# EAGLE board FPGA board V2 PCB (EAGLE 7.6.0), part 1 of 2
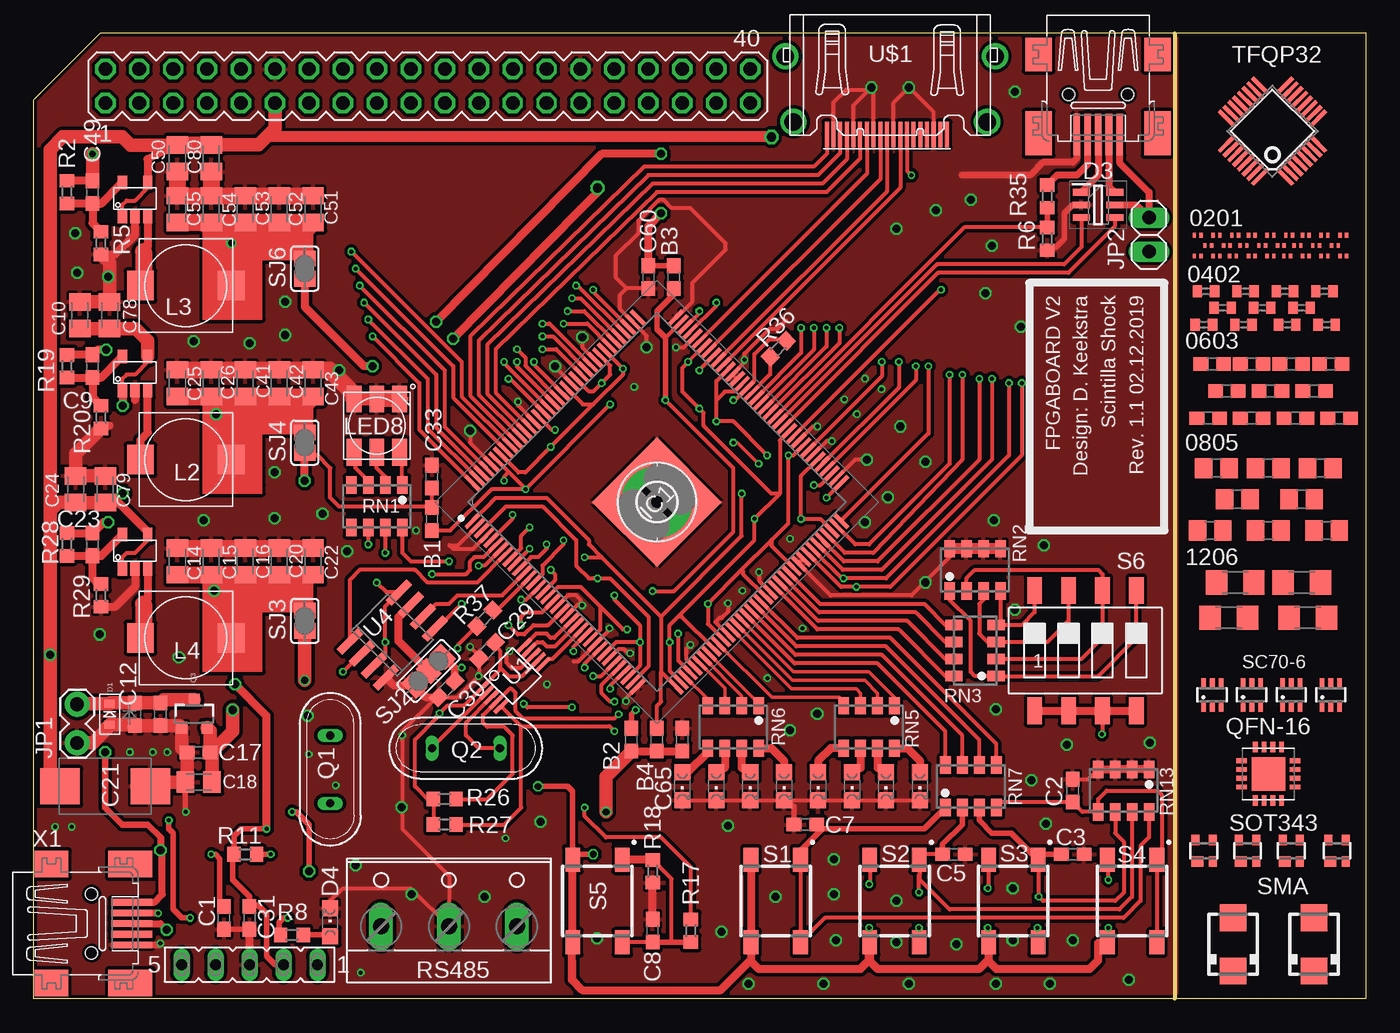
[diagram p0: board, top side]
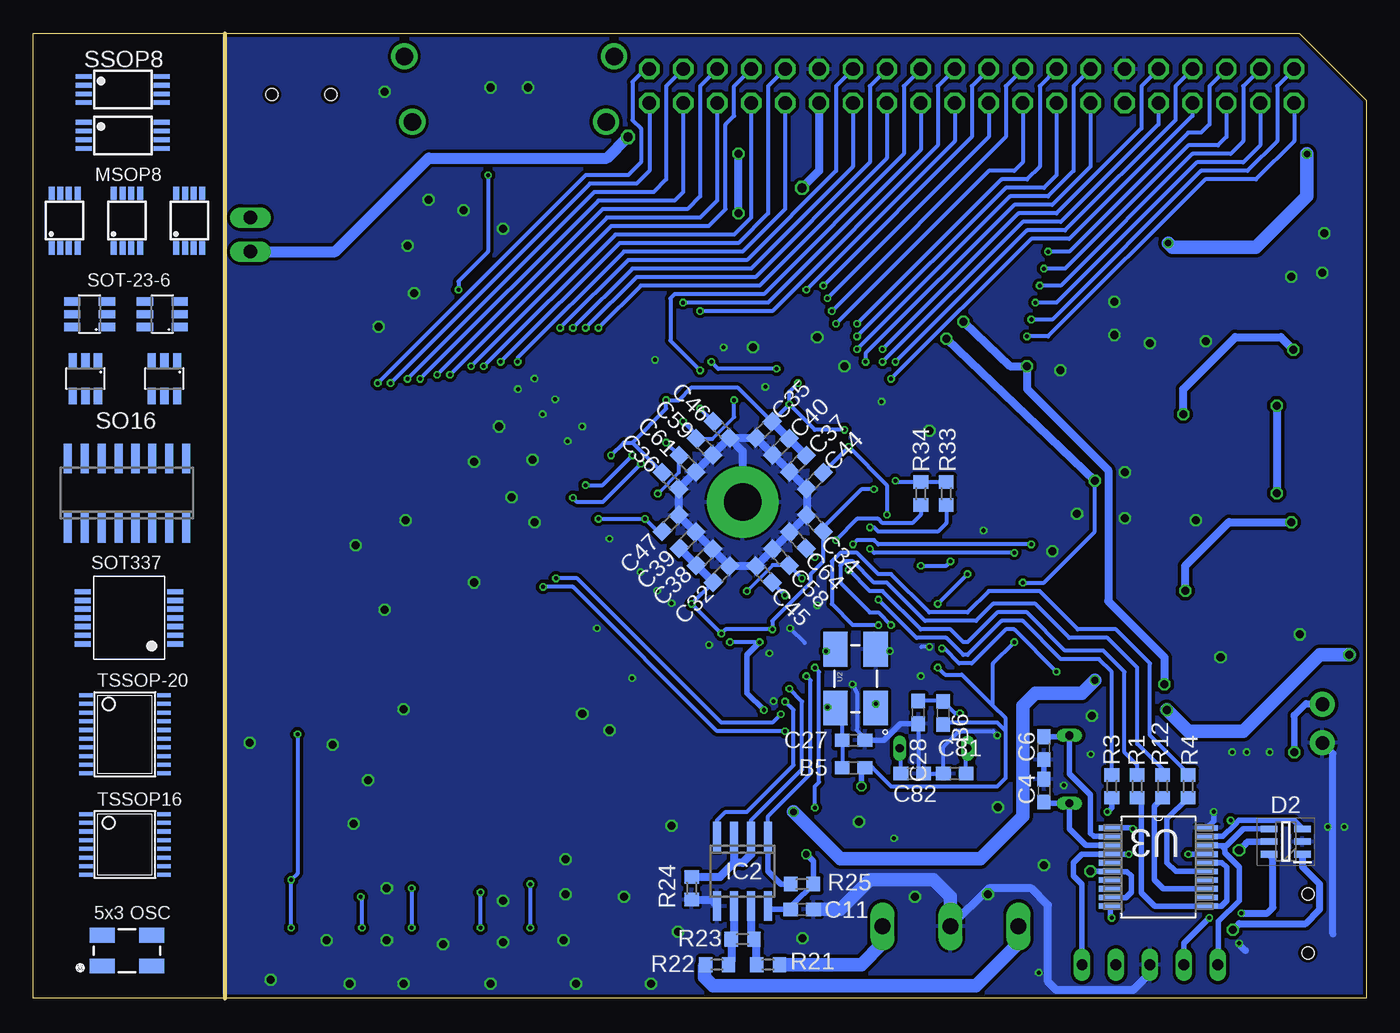
[diagram p1: board, bottom side, seen from below]

Size 99.72 x 72.19 mm. Coordinates in mm from the lower left corner, seen from the top.
Outline: 0,0 99.72,0 99.72,72.19 5,72.19 0,67.19 0,0
Copper layers (1*16): Top 0.018mm / dielectric 1.55mm / Bottom 0.018mm
Design rules "eC_2Layer_PClass6_BaseCopperO18_eCDefault *": minimum track width 0.15mm, minimum drill 0.3mm, track to track 0.15mm, track to pad 0.15mm, pad to pad 0.15mm, via to via 0.15mm, smd to smd 0mil, copper to edge 0.25mm, drill to drill 0.35mm, minimum pad ring 0.175mm, minimum via ring 0.125mm, stop-mask expansion 0mil, vias tented up to drill 0.35mm, thermal gap 0.2mm
Milling: 1 lines

## Footprints (pad centres in the part's own frame; a part is rotated, then mirrored left to right if it is on the bottom)
C0201 = smd 0.25 x 0.35: 1 -0.25,0; 2 0.25,0
C0402 = smd 0.7 x 0.9: 1 -0.65,0; 2 0.65,0
C0603 = smd 1.1 x 1: 1 -0.85,0; 2 0.85,0
C0805 = smd 1.3 x 1.5: 1 -0.95,0; 2 0.95,0
C1206 = smd 1.6 x 1.8: 1 -1.4,0; 2 1.4,0
C0805K = smd 1.3 x 1.6: 1 -1,0; 2 1,0
D/7343-31W = smd 2.95 x 2.7: + 3.375,0; - -3.375,0
SOD-523 = smd 0.8 x 0.6: A 0,-0.8; K 0,0.8
SOT95P275X110-6N = smd 1.25 x 0.5: 1 -1.25,0.95; 2 -1.25,0; 3 -1.25,-0.95; 4 1.25,-0.95; 5 1.25,0; 6 1.25,0.95
CHIPLED_0805 = smd 1.2 x 1.2: A 0,-1.05; C 0,1.05
TSOT23-6 = smd 0.62 x 1.22: 1 -0.95,-1.3; 2 0,-1.3; 3 0.95,-1.3; 4 0.95,1.3; 5 0,1.3; 6 -0.95,1.3
CRYSTAL-OSC-SMD-5X3 = smd 1.9 x 1.1: 1 -1.85,-1.15; 2 1.85,-1.15; 3 1.85,1.15; 4 -1.85,1.15
TSSOP8 = smd 1.2 x 0.35: 1 -2.925,0.975; 2 -2.925,0.325; 3 -2.925,-0.325; 4 -2.925,-0.975; 5 2.925,-0.975; 6 2.925,-0.325; 7 2.925,0.325; 8 2.925,0.975
MSOP8 = smd 0.45 x 1: 1 -0.975,-2.05; 2 -0.325,-2.05; 3 0.325,-2.05; 4 0.975,-2.05; 5 0.975,2.05; 6 0.325,2.05; 7 -0.325,2.05; 8 -0.975,2.05
SC70-6L = smd 0.35 x 0.8: 1 -0.65,-0.85; 2 0,-0.85; 3 0.65,-0.85; 4 0.65,0.85; 5 0,0.85; 6 -0.65,0.85
SOT343_INFINEON = smd 0.9 x 0.8: 1 -0.5,-0.8 | smd 0.6 x 0.8: 2 0.65,-0.8; 3 0.65,0.8; 4 -0.65,0.8
SMA = smd 2 x 2: A 2,0; C -2,0
2,8-PAD = drill 2.8 pad 5.334: B2,8 0,0
QFP50P2200X2200X165-145N = smd 1.475 x 0.3: 1 -10.738,8.75; 2 -10.738,8.25; 3 -10.738,7.75; 4 -10.738,7.25; 5 -10.738,6.75; 6 -10.738,6.25; 7 -10.738,5.75; 8 -10.738,5.25; 9 -10.738,4.75; 10 -10.738,4.25; 11 -10.738,3.75; 12 -10.738,3.25; 13 -10.738,2.75; 14 -10.738,2.25; 15 -10.738,1.75; 16 -10.738,1.25; 17 -10.738,0.75; 18 -10.738,0.25; 19 -10.738,-0.25; 20 -10.738,-0.75; 21 -10.738,-1.25; 22 -10.738,-1.75; 23 -10.738,-2.25; 24 -10.738,-2.75; 25 -10.738,-3.25; 26 -10.738,-3.75; 27 -10.738,-4.25; 28 -10.738,-4.75; 29 -10.738,-5.25; 30 -10.738,-5.75; 31 -10.738,-6.25; 32 -10.738,-6.75; 33 -10.738,-7.25; 34 -10.738,-7.75; 35 -10.738,-8.25; 36 -10.738,-8.75; 73 10.738,-8.75; 74 10.738,-8.25; 75 10.738,-7.75; 76 10.738,-7.25; 77 10.738,-6.75; 78 10.738,-6.25; 79 10.738,-5.75; 80 10.738,-5.25; 81 10.738,-4.75; 82 10.738,-4.25; 83 10.738,-3.75; 84 10.738,-3.25; 85 10.738,-2.75; 86 10.738,-2.25; 87 10.738,-1.75; 88 10.738,-1.25; 89 10.738,-0.75; 90 10.738,-0.25; 91 10.738,0.25; 92 10.738,0.75; 93 10.738,1.25; 94 10.738,1.75; 95 10.738,2.25; 96 10.738,2.75; 97 10.738,3.25; 98 10.738,3.75; 99 10.738,4.25; 100 10.738,4.75; 101 10.738,5.25; 102 10.738,5.75; 103 10.738,6.25; 104 10.738,6.75; 105 10.738,7.25; 106 10.738,7.75; 107 10.738,8.25; 108 10.738,8.75 | smd 0.3 x 1.475: 37 -8.75,-10.738; 38 -8.25,-10.738; 39 -7.75,-10.738; 40 -7.25,-10.738; 41 -6.75,-10.738; 42 -6.25,-10.738; 43 -5.75,-10.738; 44 -5.25,-10.738; 45 -4.75,-10.738; 46 -4.25,-10.738; 47 -3.75,-10.738; 48 -3.25,-10.738; 49 -2.75,-10.738; 50 -2.25,-10.738; 51 -1.75,-10.738; 52 -1.25,-10.738; 53 -0.75,-10.738; 54 -0.25,-10.738; 55 0.25,-10.738; 56 0.75,-10.738; 57 1.25,-10.738; 58 1.75,-10.738; 59 2.25,-10.738; 60 2.75,-10.738; 61 3.25,-10.738; 62 3.75,-10.738; 63 4.25,-10.738; 64 4.75,-10.738; 65 5.25,-10.738; 66 5.75,-10.738; 67 6.25,-10.738; 68 6.75,-10.738; 69 7.25,-10.738; 70 7.75,-10.738; 71 8.25,-10.738; 72 8.75,-10.738; 109 8.75,10.738; 110 8.25,10.738; 111 7.75,10.738; 112 7.25,10.738; 113 6.75,10.738; 114 6.25,10.738; 115 5.75,10.738; 116 5.25,10.738; 117 4.75,10.738; 118 4.25,10.738; 119 3.75,10.738; 120 3.25,10.738; 121 2.75,10.738; 122 2.25,10.738; 123 1.75,10.738; 124 1.25,10.738; 125 0.75,10.738; 126 0.25,10.738; 127 -0.25,10.738; 128 -0.75,10.738; 129 -1.25,10.738; 130 -1.75,10.738; 131 -2.25,10.738; 132 -2.75,10.738; 133 -3.25,10.738; 134 -3.75,10.738; 135 -4.25,10.738; 136 -4.75,10.738; 137 -5.25,10.738; 138 -5.75,10.738; 139 -6.25,10.738; 140 -6.75,10.738; 141 -7.25,10.738; 142 -7.75,10.738; 143 -8.25,10.738; 144 -8.75,10.738 | smd 6.85 x 6.85: 145 0,0
SO-08 = smd 0.6 x 2.2: 1 -1.905,-2.6; 2 -0.635,-2.6; 3 0.635,-2.6; 4 1.905,-2.6; 5 1.905,2.6; 6 0.635,2.6; 7 -0.635,2.6; 8 -1.905,2.6
1X02_LOCK = drill 1.016 pad 1.88: 1 -0.178,0; 2 2.718,0
1X02 = drill 1.016 long: 1 -1.27,0; 2 1.27,0
SLF7032T = smd 2 x 2.2: P$1 -3.4,0; P$2 3.4,0
RGBLED5050 = smd 2 x 1.1: 1 -2,1.7; 2 -2,0; 3 -2,-1.7; 4 2,-1.7; 5 2,0; 6 2,1.7
QS = drill 0.61 long: 1 -2.54,0; 2 2.54,0
SOT23-3 = smd 0.8 x 0.9: 1 -0.95,-1; 2 0.95,-1; 3 0,1.1
QFN16-4X4 = smd 0.8 x 0.35: 1 -2,0.975; 2 -2,0.325; 3 -2,-0.325; 4 -2,-0.975; 9 2,-0.975; 10 2,-0.325; 11 2,0.325; 12 2,0.975 | smd 0.35 x 0.8: 5 -0.975,-2; 6 -0.325,-2; 7 0.325,-2; 8 0.975,-2; 13 0.975,2; 14 0.325,2; 15 -0.325,2; 16 -0.975,2 | smd 2.5 x 2.5: EXP 0,0
R0603 = smd 1 x 1.1: 1 -0.85,0; 2 0.85,0
744-8NS = smd 0.8 x 1.3: 1 -1.905,-1.587; 2 -0.635,-1.587; 3 0.635,-1.587; 4 1.905,-1.587; 5 1.905,1.587; 6 0.635,1.587; 7 -0.635,1.587; 8 -1.905,1.587
W237-3E = drill 1.194 long: 1 -5.08,-0.635; 2 0,-0.635; 3 5.08,-0.635
SKQGAKE010 = smd 1.8 x 1.1: 1 -3.1,1.85; 2 3.1,1.85; 3 -3.1,-1.85; 4 3.1,-1.85
SMS-004 = smd 1.092 x 2.007: 1 -3.81,-4.496; 2 -1.27,-4.496; 3 1.27,-4.496; 4 3.81,-4.496; 5 3.81,4.496; 6 1.27,4.496; 7 -1.27,4.496; 8 -3.81,4.496
SJ_2 = smd 1.168 x 1.6: 1 -1.524,0; 2 0,0; 3 1.524,0
SJ = smd 1.168 x 1.6: 1 -0.762,0; 2 0.762,0
SO16 = smd 0.6 x 2.2: 1 -4.445,-2.6; 2 -3.175,-2.6; 3 -1.905,-2.6; 4 -0.635,-2.6; 5 0.635,-2.6; 6 1.905,-2.6; 7 3.175,-2.6; 8 4.445,-2.6; 9 4.445,2.6; 10 3.175,2.6; 11 1.905,2.6; 12 0.635,2.6; 13 -0.635,2.6; 14 -1.905,2.6; 15 -3.175,2.6; 16 -4.445,2.6
SOT337 = smd 0.4 x 1.2: 1 -1.95,-3.45; 2 -1.3,-3.45; 3 -0.65,-3.45; 4 0,-3.45; 5 0.65,-3.45; 6 1.3,-3.45; 7 1.95,-3.45; 8 1.95,3.45; 9 1.3,3.45; 10 0.65,3.45; 11 0,3.45; 12 -0.65,3.45; 13 -1.3,3.45; 14 -1.95,3.45
FE05-1 = drill 0.813 long: 1 -5.08,0; 2 -2.54,0; 3 0,0; 4 2.54,0; 5 5.08,0
MA20-2 = drill 1.016 octagon: 1 -24.13,-1.27; 2 -24.13,1.27; 3 -21.59,-1.27; 4 -21.59,1.27; 5 -19.05,-1.27; 6 -19.05,1.27; 7 -16.51,-1.27; 8 -16.51,1.27; 9 -13.97,-1.27; 10 -13.97,1.27; 11 -11.43,-1.27; 12 -11.43,1.27; 13 -8.89,-1.27; 14 -8.89,1.27; 15 -6.35,-1.27; 16 -6.35,1.27; 17 -3.81,-1.27; 18 -3.81,1.27; 19 -1.27,-1.27; 20 -1.27,1.27; 21 1.27,-1.27; 22 1.27,1.27; 23 3.81,-1.27; 24 3.81,1.27; 25 6.35,-1.27; 26 6.35,1.27; 27 8.89,-1.27; 28 8.89,1.27; 29 11.43,-1.27; 30 11.43,1.27; 31 13.97,-1.27; 32 13.97,1.27; 33 16.51,-1.27; 34 16.51,1.27; 35 19.05,-1.27; 36 19.05,1.27; 37 21.59,-1.27; 38 21.59,1.27; 39 24.13,-1.27; 40 24.13,1.27
LQFP-32 = smd 0.3 x 1.6: 1 -1.75,-3.1; 2 -1.25,-3.1; 3 -0.75,-3.1; 4 -0.25,-3.1; 5 0.25,-3.1; 6 0.75,-3.1; 7 1.25,-3.1; 8 1.75,-3.1; 17 1.75,3.1; 18 1.25,3.1; 19 0.75,3.1; 20 0.25,3.1; 21 -0.25,3.1; 22 -0.75,3.1; 23 -1.25,3.1; 24 -1.75,3.1 | smd 1.6 x 0.3: 9 3.1,-1.75; 10 3.1,-1.25; 11 3.1,-0.75; 12 3.1,-0.25; 13 3.1,0.25; 14 3.1,0.75; 15 3.1,1.25; 16 3.1,1.75; 25 -3.1,1.75; 26 -3.1,1.25; 27 -3.1,0.75; 28 -3.1,0.25; 29 -3.1,-0.25; 30 -3.1,-0.75; 31 -3.1,-1.25; 32 -3.1,-1.75
TSSOP16 = smd 0.305 x 0.991: 1 -2.275,-2.918; 2 -1.625,-2.918; 3 -0.975,-2.918; 4 -0.325,-2.918; 5 0.325,-2.918; 6 0.975,-2.918; 7 1.625,-2.918; 8 2.275,-2.918; 9 2.275,2.918; 10 1.625,2.918; 11 0.975,2.918; 12 0.325,2.918; 13 -0.325,2.918; 14 -0.975,2.918; 15 -1.625,2.918; 16 -2.275,2.918
TSSOP20 = smd 0.305 x 0.991: 1 -2.925,-2.918; 2 -2.275,-2.918; 3 -1.625,-2.918; 4 -0.975,-2.918; 5 -0.325,-2.918; 6 0.325,-2.918; 7 0.975,-2.918; 8 1.625,-2.918; 9 2.275,-2.918; 10 2.925,-2.918; 11 2.925,2.918; 12 2.275,2.918; 13 1.625,2.918; 14 0.975,2.918; 15 0.325,2.918; 16 -0.325,2.918; 17 -0.975,2.918; 18 -1.625,2.918; 19 -2.275,2.918; 20 -2.925,2.918
MSOP-10 = smd 1.4 x 0.3: 1 -2.2,1; 2 -2.2,0.5; 3 -2.2,0; 4 -2.2,-0.5; 5 -2.2,-1; 6 2.2,-1; 7 2.2,-0.5; 8 2.2,0; 9 2.2,0.5; 10 2.2,1
CRYSTAL-SMD-5X3_SOLDER = smd 2.6 x 1.8: 1 -2.2,-1.5; 2 2.2,-1.5; 3 2.2,1.5; 4 -2.2,1.5
SOP65P780X200-20N = smd 1.676 x 0.432: 1 -3.607,2.921; 2 -3.607,2.286; 3 -3.607,1.626; 4 -3.607,0.965; 5 -3.607,0.33; 6 -3.607,-0.33; 7 -3.607,-0.965; 8 -3.607,-1.626; 9 -3.607,-2.286; 10 -3.607,-2.921; 11 3.607,-2.921; 12 3.607,-2.286; 13 3.607,-1.626; 14 3.607,-0.965; 15 3.607,-0.33; 16 3.607,0.33; 17 3.607,0.965; 18 3.607,1.626; 19 3.607,2.286; 20 3.607,2.921
SOIC8 = smd 0.6 x 2.2: 1 -1.905,-2.6; 2 -0.635,-2.6; 3 0.635,-2.6; 4 1.905,-2.6; 5 1.905,2.6; 6 0.635,2.6; 7 -0.635,2.6; 8 -1.905,2.6
HDMI_A = smd 0.3 x 1.9: P$1 4.75,3.95; P$2 4.25,3.95; P$3 3.75,3.95; P$4 3.25,3.95; P$5 2.75,3.95; P$6 2.25,3.95; P$7 1.75,3.95; P$8 1.25,3.95; P$9 0.75,3.95; P$10 0.25,3.95; P$11 -0.25,3.95; P$12 -0.75,3.95; P$13 -1.25,3.95; P$14 -1.75,3.95; P$15 -2.25,3.95; P$16 -2.75,3.95; P$17 -3.25,3.95; P$18 -3.75,3.95; P$19 -4.25,3.95 | drill 1.3: P$20 -7.25,3; P$21 7.25,3; P$22 7.85,-1.9; P$23 -7.85,-1.9
TSOT-25 = smd 0.7 x 1: 1 -0.95,-1.2; 2 0,-1.2; 3 0.95,-1.2; 4 0.95,1.37; 5 -0.94,1.37
32005-201 = smd 3.1 x 0.5: 1 3,1.6; 2 3,0.8; 3 3,0; 4 3,-0.8; 5 3,-1.6 | smd 2.5 x 2: M1 -3,-4.45; M2 -3,4.45 | smd 3.3 x 2: M3 2.9,4.45; M4 2.9,-4.45 | hole 0.9: 0,2.2; 0,-2.2

## Placement (x,y rotation side)
0201  [C0201]  87.12,57.1 0 top
0402  [C0402]  87.74,52.9 0 top
0603  [C0603]  88.21,47.45 0 top
0805  [C0805]  88.52,39.67 0 top
1206  [C1206]  89.92,31.11 0 top
B1  B-EU  [C0603]  29.83,35.86 270 top
B2  B-EU  [C0603]  44.75,19.35 90 top
B3  B-EU  [C0603]  47.92,53.96 270 top
B4  B-EU  [C0603]  46.65,19.35 90 top
B5  B-EU  [C0603]  38.35,17.26 180 bottom
B6  B-EU  [C0603]  31.64,21.35 90 bottom
C1  100nF  [C0603]  14.27,6.02 90 top
C2  100nF  [C0603]  77.77,15.54 90 top
C3  100nF  [C0603]  77.77,10.78 0 top
C4  16pF  [C0603]  24.11,15.54 270 bottom
C5  100nF  [C0603]  68.88,10.78 180 top
C6  16pF  [C0603]  24.11,18.72 90 bottom
C7  100nF  [C0603]  57.77,13 0 top
C8  100nF  [C0603]  46.34,5.07 90 top
C9  22pF  [C0603]  4.43,47.29 270 top
C10  10uF X5R  [C0805K]  3.47,51.1 90 top
C11  100nF  [C0603]  42.21,6.65 0 bottom
C12  22pF  [C0603]  7.6,21.26 270 top
C13  100nF  [C0603]  9.51,21.26 270 top
C14  10uF X5R  [C0805K]  10.78,32.69 90 top
C15  10uF X5R  [C0805K]  13.32,32.69 90 top
C16  10uF X5R  [C0805K]  15.86,32.69 90 top
C17  100nF  [C0603]  12.36,18.4 180 top
C18  10uF X5R  [C0805K]  12.36,16.18 180 top
C20  10uF X5R  [C0805K]  18.4,32.69 90 top
C21  330uF 10V (10tpe330m)  [D/7343-31W]  5.38,15.86 180 top
C22  10uF X5R  [C0805K]  20.94,32.69 90 top
C23  22pF  [C0603]  4.43,33.96 270 top
C24  10uF X5R  [C0805K]  3.16,38.09 90 top
C25  10uF X5R  [C0805K]  10.78,46.02 90 top
C26  10uF X5R  [C0805K]  13.32,46.02 90 top
C27  100nF  [C0603]  38.35,19.32 180 bottom
C28  100nF  [C0603]  33.5,21.39 90 bottom
C29  100nF  [C0603]  33.95,26.02 225 top
C30  100nF  [C0603]  30.91,23.14 45 top
C31  100nF  [C0603]  16.17,6.02 270 top
C32  100nF  [C0603]  48.24,31.74 45 bottom
C33  100nF  [C0603]  29.83,39.04 90 top
C34  100nF  [C0603]  41.26,35.55 135 bottom
C35  100nF  [C0603]  45.07,42.53 225 bottom
C36  100nF  [C0603]  52.05,38.72 315 bottom
C37  100nF  [C0603]  42.53,39.99 225 bottom
C38  100nF  [C0603]  49.51,33.01 45 bottom
C39  100nF  [C0603]  50.78,34.28 45 bottom
C40  100nF  [C0603]  43.8,41.26 225 bottom
C41  10uF X5R  [C0805K]  15.86,46.02 90 top
C42  10uF X5R  [C0805K]  18.4,46.02 90 top
C43  10uF X5R  [C0805K]  20.94,46.02 90 top
C44  100nF  [C0603]  41.26,38.72 225 bottom
C45  100nF  [C0603]  45.07,31.74 135 bottom
C46  100nF  [C0603]  48.24,42.53 315 bottom
C47  100nF  [C0603]  52.05,35.55 45 bottom
C49  22pF  [C0603]  4.43,60.31 270 top
C50  10uF X5R  [C0805K]  10.78,62.85 270 top
C51  10uF X5R  [C0805K]  20.94,59.04 90 top
C52  10uF X5R  [C0805K]  18.4,59.04 90 top
C53  10uF X5R  [C0805K]  15.86,59.04 90 top
C54  10uF X5R  [C0805K]  13.32,59.04 90 top
C55  10uF X5R  [C0805K]  10.78,59.04 90 top
C58  100nF  [C0603]  43.8,33.01 135 bottom
C59  100nF  [C0603]  49.51,41.26 315 bottom
C60  100nF  [C0603]  46.02,53.96 270 top
C61  100nF  [C0603]  50.78,39.99 315 bottom
C64  100nF  [C0603]  42.53,34.28 135 bottom
C65  100nF  [C0603]  48.56,19.35 90 top
C78  10uF X5R  [C0805K]  5.7,51.1 90 top
C79  10uF X5R  [C0805K]  5.38,38.09 90 top
C80  10uF X5R  [C0805K]  13.32,62.85 270 top
C81  16pF  [C0603]  30.78,16.81 0 bottom
C82  16pF  [C0603]  33.95,16.81 180 bottom
D1  Bi TVS 5V  [SOD-523]  5.7,21.26 0 top
D2  IP4234CZ6,125  [SOT95P275X110-6N]  6.01,11.73 180 bottom
D3  IP4234CZ6,125  [SOT95P275X110-6N]  79.67,59.36 0 top
D4  LED0805  [CHIPLED_0805]  22.21,5.7 0 top
E$1  [TSOT23-6]  95.52,51.18 90 bottom
E$2  [TSOT23-6]  90.08,51.18 90 bottom
E$3  [CRYSTAL-OSC-SMD-5X3]  92.72,3.58 0 bottom
E$4  [TSOT23-6]  89.92,46.36 180 bottom
E$5  [C0201]  89.92,57.1 0 top
E$6  [C0201]  88.52,57.1 0 top
E$7  [C0201]  91.17,57.1 0 top
E$8  [C0201]  92.57,57.1 0 top
E$9  [C0201]  93.97,57.1 0 top
E$10  [C0201]  95.21,57.1 0 top
E$11  [C0201]  96.61,57.1 0 top
E$12  [C0201]  98.01,57.1 0 top
E$13  [C0201]  87.9,56.32 0 top
E$14  [C0201]  89.3,56.32 0 top
E$15  [C0201]  90.54,56.32 0 top
E$16  [C0201]  91.94,56.32 0 top
E$17  [C0201]  93.34,56.32 0 top
E$18  [C0201]  94.59,56.32 0 top
E$19  [C0201]  95.99,56.32 0 top
E$20  [C0201]  97.39,56.32 0 top
E$21  [C0402]  90.54,50.41 0 top
E$22  [C0402]  90.7,52.9 0 top
E$23  [C0402]  93.66,52.9 0 top
E$24  [C0402]  96.61,52.9 0 top
E$25  [C0402]  88.99,51.65 0 top
E$26  [C0402]  91.94,51.65 0 top
E$27  [C0402]  94.9,51.65 0 top
E$28  [C0402]  87.59,50.41 0 top
E$29  [C0402]  93.81,50.41 0 top
E$30  [C0402]  96.77,50.41 0 top
E$31  [C0805]  90.08,37.34 0 top
E$32  [C0603]  91.17,47.45 0 top
E$33  [TSSOP8]  93.03,64.56 0 bottom
E$34  [C0603]  94.12,47.45 0 top
E$35  [MSOP8]  92.72,58.19 0 bottom
E$36  [MSOP8]  88.06,58.19 0 bottom
E$37  [C0603]  97.08,47.45 0 top
E$38  [C0603]  89.3,45.43 0 top
E$39  [C0603]  92.57,45.43 0 top
E$40  [C0603]  95.83,45.43 0 top
E$41  [C0603]  87.9,43.41 0 top
E$42  [C0603]  91.17,43.41 0 top
E$43  [C0603]  94.43,43.41 0 top
E$44  [C0603]  97.7,43.41 0 top
E$45  [C0805]  92.41,39.67 0 top
E$46  [C0805]  96.3,39.67 0 top
E$47  [C0805]  94.9,37.34 0 top
E$48  [C0805]  88.06,35 0 top
E$49  [C0805]  92.41,35 0 top
E$50  [C0805]  96.77,35 0 top
E$51  [C0201]  87.12,55.54 0 top
E$52  [C0201]  88.52,55.54 0 top
E$53  [C0201]  89.77,55.54 0 top
E$54  [C0201]  91.17,55.54 0 top
E$55  [C0201]  92.57,55.54 0 top
E$56  [C0201]  93.81,55.54 0 top
E$57  [C0201]  95.21,55.54 0 top
E$58  [C0201]  96.61,55.54 0 top
E$59  [C0201]  98.01,55.54 0 top
E$60  [SC70-6L]  94.12,22.71 0 top
E$61  [C1206]  94.9,31.11 0 top
E$62  [C1206]  89.46,28.47 0 top
E$63  [C1206]  95.37,28.47 0 top
E$64  [SC70-6L]  91.17,22.71 0 top
E$65  [SC70-6L]  97.08,22.71 0 top
E$67  [SOT343_INFINEON]  90.86,11.05 0 top
E$68  [SOT343_INFINEON]  94.12,11.05 0 top
E$69  [SOT343_INFINEON]  97.55,11.05 0 top
E$70  [SMA]  95.83,4.04 90 top
H1  Ground pad for FPGA  [2,8-PAD]  46.65,37.13 0 top
IC1  10CL016YE144C8G  [QFP50P2200X2200X165-145N]  46.65,37.13 45 top
IC2  Any 3.3v rs485  [SO-08]  46.65,9.51 180 bottom
JP1  M02LOCK  [1X02_LOCK]  3.27,19.29 90 top
JP2  [1X02]  83.48,57.14 90 top
L2  3.3uH 1.9A PWR  [SLF7032T]  11.41,40.31 180 top
L3  3.3uH 1.9A PWR  [SLF7032T]  11.41,53.33 180 top
L4  3.3uH 1.9A PWR  [SLF7032T]  11.41,26.97 180 top
LED0  LED0805  [CHIPLED_0805]  48.56,15.86 180 top
LED1  LED0805  [CHIPLED_0805]  51.1,15.86 180 top
LED2  LED0805  [CHIPLED_0805]  53.64,15.86 180 top
LED3  LED0805  [CHIPLED_0805]  56.18,15.86 180 top
LED4  LED0805  [CHIPLED_0805]  58.72,15.86 180 top
LED5  LED0805  [CHIPLED_0805]  61.26,15.86 180 top
LED6  LED0805  [CHIPLED_0805]  63.8,15.86 180 top
LED7  LED0805  [CHIPLED_0805]  66.34,15.86 180 top
LED8  RGBLED5050  [RGBLED5050]  25.7,42.85 90 top
MSOP8  [MSOP8]  97.39,58.19 0 bottom
Q1  12MHz  [QS]  22.21,17.13 270 top
Q2  25MHz  [QS]  32.37,18.72 180 top
Q3  NTR2101P  [SOT23-3]  12.05,21.26 0 top
QFN-16  [QFN16-4X4]  92.41,16.8 0 top
R1  0  [R0603]  17.13,15.86 90 bottom
R2  32k  [R0603]  2.52,60.31 90 top
R3  0  [R0603]  19.03,15.86 90 bottom
R4  0  [R0603]  13.32,15.86 90 bottom
R5  10k  [R0603]  5.06,56.5 90 top
R6  200  [R0603]  75.86,56.82 90 top
R8  1k  [R0603]  19.35,4.75 180 top
R11  10k  [R0603]  15.86,10.78 180 top
R12  0  [R0603]  15.22,15.86 90 bottom
R17  1k  [R0603]  49.19,5.07 90 top
R18  10k  [R0603]  46.34,9.51 90 top
R19  150k  [R0603]  2.52,47.29 90 top
R20  33k  [R0603]  5.06,43.48 90 top
R21  10  [R0603]  44.75,2.53 0 bottom
R22  10  [R0603]  48.56,2.53 180 bottom
R23  120  [R0603]  46.65,4.43 0 bottom
R24  10k  [R0603]  50.46,8.24 90 bottom
R25  10k  [R0603]  42.21,8.56 180 bottom
R26  2k2  [R0603]  30.78,14.91 0 top
R27  2k2  [R0603]  30.78,13 0 top
R28  100k  [R0603]  2.52,33.96 90 top
R29  100k  [R0603]  5.06,30.15 90 top
R33  10k  [R0603]  31.41,37.77 270 bottom
R34  10k  [R0603]  33.32,37.77 270 bottom
R35  100  [R0603]  75.86,59.99 90 top
R36  10k  [R0603]  55.74,48.6 45 top
R37  25R  [R0603]  33.78,28.45 45 top
RN1  1k  [744-8NS]  25.7,36.82 180 top
RN2  10k  [744-8NS]  70.47,32.05 0 top
RN3  1k  [744-8NS]  70.47,26.02 90 top
RN5  1k  [744-8NS]  62.53,20.31 180 top
RN6  1k  [744-8NS]  52.37,20.31 180 top
RN7  1k  [744-8NS]  70.15,15.86 0 top
RN13  10k  [744-8NS]  81.58,15.54 180 top
RS485  [W237-3E]  31.1,6.02 0 top
S1  SKQGADE010  [SKQGAKE010]  55.54,7.29 270 top
S2  SKQGADE010  [SKQGAKE010]  64.43,7.29 270 top
S3  SKQGADE010  [SKQGAKE010]  73.32,7.29 270 top
S4  SKQGADE010  [SKQGAKE010]  82.21,7.29 270 top
S5  SKQGADE010  [SKQGAKE010]  42.21,7.29 270 top
S6  SWS004  [SMS-004]  78.72,26.02 0 top
SC70-6  [SC70-6L]  88.21,22.71 0 top
SJ2  [SJ_2]  29.56,24.49 225 top
SJ3  [SJ]  20.3,28.24 270 top
SJ4  [SJ]  20.3,41.58 270 top
SJ6  [SJ]  20.3,54.6 270 top
SMA  [SMA]  89.77,4.04 90 top
SO16  [SO16]  92.72,37.8 0 bottom
SOT337  [SOT337]  92.57,28.47 90 bottom
SOT343  [SOT343_INFINEON]  87.59,11.05 0 top
SOT-23-6  [TSOT23-6]  95.83,46.36 180 bottom
SSOP8  [TSSOP8]  93.03,67.99 0 bottom
SV1  [FE05-1]  16.17,2.53 180 top
SV4  [MA20-2]  29.51,68.25 0 top
TFQP32  [LQFP-32]  92.72,64.87 45 top
TSSOP16  [TSSOP16]  92.88,11.51 270 bottom
TSSOP-20  [TSSOP20]  92.88,19.76 270 bottom
U1  [MSOP-10]  35.86,24.12 45 top
U2  OSCILLATOR5X3_SOLDER  [CRYSTAL-SMD-5X3_SOLDER]  38.19,23.92 90 bottom
U3  PIC18F14K50-I/SS  [SOP65P780X200-20N]  15.54,9.83 0 bottom
U4  IS25LQ040B-JNLE  [SOIC8]  26.87,27.18 315 top
U$1  HDMI  [HDMI_A]  64.12,68.57 180 top
U$3  AP3429  [TSOT-25]  7.6,46.66 0 top
U$7  AP3429  [TSOT-25]  7.6,33.32 0 top
U$11  AP3429  [TSOT-25]  7.6,59.68 0 top
X1  MINI-USB-32005-201  [32005-201]  4.36,5.6 0 top
X2  MINI-USB-32005-201  [32005-201]  79.67,67.61 270 top

## Library data of the parts
0201 0603 0805 1206 E$5-E$20 E$31-E$65 E$67-E$69 L2-L4 MSOP8 SC70-6 SO16 SOT343 SSOP8 TFQP32 TSSOP16 TSSOP-20 U4 U$3 U$7 U$11 = 00dkeekstra
0402 C1-C18 C20-C47 C49-C55 C58-C61 C64 C65 C78-C82 E$21-E$30 R1-R5 R8 R11 R12 R17-R20 R28 R29 R33 R34 R36 = rcl
B1-B6 = rcl; B: 1.2A
D1 LED8 = adafruit
D2 D3 = SamacSys_Parts; DESCRIPTION: TVS DIODE 5.5VWM 6TSOP; HEIGHT: 1.1mm; MANUFACTURER_NAME: Nexperia; MANUFACTURER_PART_NUMBER: IP4234CZ6,125; MOUSER_PART_NUMBER: 771-IP4234CZ6125; MOUSER_PRICE-STOCK: https://www.mouser.com/Search/Refine.aspx?Keyword=771-IP4234CZ6125
D4 LED0 LED1-LED7 = CEDT
E$1 E$2 E$4 SOT-23-6 = linear-technology
E$3 U2 = SparkFun-FreqCtrl_good
E$70 SMA = diode
H1 = holes
IC1 = SamacSys_Parts; DESCRIPTION: FPGA - Field Programmable Gate Array; HEIGHT: 1.65mm; MANUFACTURER_NAME: Intel; MANUFACTURER_PART_NUMBER: 10CL016YE144C8G; MOUSER_PART_NUMBER: 989-10CL016YE144C8G; MOUSER_PRICE-STOCK: https://www.mouser.com/Search/Refine.aspx?Keyword=989-10CL016YE144C8G
IC2 = texas; MF: TEXAS INSTRUMENTS; MPN: SN65176BD; OC_FARNELL: 9589970; OC_NEWARK: 08F5891
JP1 = SparkFun-Connectors
JP2 = pinhead
Q1 Q2 = special
Q3 = SparkFun-DiscreteSemi; PROD_ID: TRANS-11153
QFN-16 = 00_cody
R6 R21-R27 R35 R37 = resistor
RN1-RN3 RN5-RN7 RN13 = resistor-array
RS485 = con-wago-508; OC_FARNELL: unknown; OC_NEWARK: unknown
S1-S5 = SamacSys_Parts; DESCRIPTION: Tact switch,SMT,SPST,with stem,2.55N o/f Stem Tactile Switch, SPST-NO 50 mA 1.5mm; HEIGHT: mm; MANUFACTURER_NAME: ALPS; MANUFACTURER_PART_NUMBER: SKQGADE010; MOUSER_PART_NUMBER: 688-SKQGAD; MOUSER_PRICE-STOCK: https://www.mouser.com/Search/Refine.aspx?Keyword=688-SKQGAD
S6 = smd-special
SJ2-SJ4 SJ6 = jumper
SOT337 = nxp_60
SV1 = con-lsta; OC_FARNELL: unknown; OC_NEWARK: unknown
SV4 = con-lstb; OC_FARNELL: unknown; OC_NEWARK: unknown
U1 = Tristan+Robitaille's+Library
U3 = PIC18F14K50-I_SS; AVAILABILITY: Unavailable; DESCRIPTION: PIC18 Series 768 B RAM 16 kB Flash 8-Bit Enhanced Microcontroller - SSOP-20; MF: Microchip; MP: PIC18F14K50-I/SS; PACKAGE: SSOP-20 Microchip; PRICE: None
U$1 = open-ephys
X1 X2 = con-cypressindustries; OC_FARNELL: unknown; OC_NEWARK: unknown

## Nets
50MHZ_OUT: IC1.25 U2.3
+1V2: B2.1 B4.1 C65.1 SJ3.2
+2V5: B3.1 C31.1 C60.1 R11.2 SJ6.2 SV1.2 U3.1
+3V3: B1.1 B5.1 B6.1 C11.1 C30.2 C33.1 IC2.8 R25.1 S1.3 S1.4 S2.3 S2.4 S3.3 S3.4 S4.3 S4.4 S5.3 S5.4 S6.1 S6.2 S6.3 S6.4 SJ2.1 SJ4.2 SV4.29 U4.3 U4.8
+5V: C10.1 C17.1 C18.1 C21.+ C24.1 C50.1 C78.1 C79.1 C80.1 JP2.1 Q3.2 SV4.11 U$3.1 U$3.4 U$7.1 U$7.4 U$11.1 U$11.4
CLK_SCL: IC1.66 R26.2 SV4.39 U1.4
CLK_SDA: IC1.65 R27.2 SV4.40 U1.5
D+: D2.3 SV1.4 U3.19
D-: D2.4 SV1.5 U3.18
FL_CE: IC1.8 U4.1
FL_CLK: IC1.12 U4.6
FL_SI: IC1.6 U4.5
FL_SO: IC1.13 R37.2
GND: C1.1 C2.2 C3.2 C4.1 C5.1 C6.1 C7.1 C8.2 C10.2 C11.2 C12.2 C13.2 C14.2 C15.2 C16.2 C17.2 C18.2 C20.2 C21.- C22.2 C24.2 C25.2 C26.2 C27.1 C28.1 C29.2 C30.1 C31.2 C32.2 C33.2 C34.2 C35.2 C36.2 C37.2 C38.2 C39.2 C40.2 C41.2 C42.2 C43.2 C44.2 C45.2 C46.2 C47.2 C50.2 C51.2 C52.2 C53.2 C54.2 C55.2 C58.2 C59.2 C60.2 C61.2 C64.2 C65.2 C78.2 C79.2 C80.2 C81.1 C82.1 D1.A D2.2 D3.2 D4.C H1.B2,8 IC1.2 IC1.4 IC1.19 IC1.21 IC1.27 IC1.30 IC1.36 IC1.41 IC1.48 IC1.57 IC1.63 IC1.64 IC1.74 IC1.79 IC1.82 IC1.95 IC1.96 IC1.104 IC1.108 IC1.110 IC1.118 IC1.123 IC1.131 IC1.140 IC1.145 IC2.5 JP1.1 LED0.C LED1.C LED2.C LED3.C LED4.C LED5.C LED6.C LED7.C LED8.4 LED8.5 LED8.6 Q3.1 R5.1 R6.1 R18.1 R20.1 R24.1 R29.1 RN2.5 RN2.6 RN2.7 RN2.8 RN13.1 RN13.2 RN13.3 RN13.4 RS485.2 SJ2.3 SV1.3 SV4.12 SV4.30 U1.8 U2.2 U3.20 U4.4 U$1.P$2 U$1.P$5 U$1.P$8 U$1.P$11 U$1.P$17 U$3.2 U$7.2 U$11.2 X1.5 X2.5
GPI_7: IC1.129 SV4.7
GPI_8: IC1.128 SV4.8
GPI_9: IC1.127 SV4.9
GPI_10: IC1.126 SV4.10
GPI_23: IC1.91 SV4.25
GPI_24: IC1.90 SV4.26
GPI_25: IC1.89 SV4.27
GPI_26: IC1.88 SV4.28
GPIO_1: IC1.144 SV4.1
GPIO_2: IC1.143 SV4.2
GPIO_3: IC1.142 SV4.3
GPIO_4: IC1.141 SV4.4
GPIO_5: IC1.137 SV4.5
GPIO_6: IC1.136 SV4.6
GPIO_11: IC1.125 SV4.13
GPIO_12: IC1.121 SV4.14
GPIO_13: IC1.120 SV4.15
GPIO_14: IC1.119 SV4.16
GPIO_15: IC1.115 SV4.17
GPIO_16: IC1.114 SV4.18
GPIO_17: IC1.113 SV4.19
GPIO_18: IC1.112 SV4.20
GPIO_19: IC1.111 SV4.21
GPIO_20: IC1.106 SV4.22
GPIO_21: IC1.105 SV4.23
GPIO_22: IC1.100 SV4.24
GPIO_27: IC1.80 SV4.31
GPIO_28: IC1.77 SV4.32
GPIO_29: IC1.76 SV4.33
GPIO_30: IC1.72 SV4.34
GPIO_31: IC1.71 SV4.35
GPIO_32: IC1.69 SV4.36
GPIO_33: IC1.68 SV4.37
GPIO_34: IC1.67 SV4.38
HDMI_CEC: IC1.83 U$1.P$13
HDMI_CLKN: IC1.98 U$1.P$12
HDMI_CLKP: IC1.99 U$1.P$10
HDMI_DATA0N: IC1.101 U$1.P$9
HDMI_DATA0P: IC1.103 U$1.P$7
HDMI_DATA1N: IC1.132 U$1.P$6
HDMI_DATA1P: IC1.133 U$1.P$4
HDMI_DATA2N: IC1.134 U$1.P$3
HDMI_DATA2P: IC1.135 U$1.P$1
L2: C9.1 C25.1 C26.1 C41.1 C42.1 C43.1 L2.P$1 R19.2 SJ4.1
LED_0: IC1.39 RN6.4
LED_1: IC1.42 RN6.3
LED_2: IC1.43 RN6.2
LED_3: IC1.44 RN6.1
LED_4: IC1.46 RN5.4
LED_5: IC1.49 RN5.3
LED_6: IC1.50 RN5.2
LED_7: IC1.51 RN5.1
N$1: R8.2 U3.10
N$2: D4.A R8.1
N$3: R1.1 U3.11 U3.16
N$4: L3.P$2 U$11.3
N$5: C1.2 U3.17
N$6: R4.1 U3.15
N$7: R11.1 SV1.1 U3.4
N$8: C49.1 C51.1 C52.1 C53.1 C54.1 C55.1 L3.P$1 R2.2 SJ6.1
N$9: C49.2 R2.1 R5.2 U$11.5
N$10: R3.1 U3.6 U3.9
N$11: D2.1 X1.3
N$12: R12.1 U3.13
N$13: D2.6 X1.2
N$15: RN2.3 RN3.3 S6.7
N$16: C4.2 Q1.2 U3.3
N$17: C6.2 Q1.1 U3.2
N$22: RN2.1 RN3.1 S6.5
N$23: RN2.2 RN3.2 S6.6
N$24: IC1.9 R33.2
N$25: RN2.4 RN3.4 S6.8
N$29: C14.1 C15.1 C16.1 C20.1 C22.1 C23.1 L4.P$1 R28.2 SJ3.1
N$30: C23.2 R28.1 R29.2 U$7.5
N$31: IC1.14 R34.2
N$33: IC1.92 R36.1
N$45: LED7.A RN5.8
N$46: LED6.A RN5.7
N$47: LED5.A RN5.6
N$48: LED4.A RN5.5
N$49: LED3.A RN6.8
N$50: D3.6 X2.2
N$51: LED2.A RN6.7
N$52: LED1.A RN6.6
N$53: LED0.A RN6.5
N$54: D3.1 X2.3
N$57: LED8.1 RN1.3
N$58: LED8.2 RN1.2
N$59: LED8.3 RN1.1
N$63: C2.1 RN7.4 RN13.5 S4.1 S4.2
N$64: C3.1 RN7.3 RN13.6 S3.1 S3.2
N$65: C5.2 RN7.2 RN13.7 S2.1 S2.2
N$67: C7.2 RN7.1 RN13.8 S1.1 S1.2
N$68: C8.1 R17.1 R18.2 S5.1 S5.2
N$75: C82.2 Q2.1 U1.3
N$76: C81.2 Q2.2 U1.2
N$77: D3.5 JP2.2 X2.1
N$78: L2.P$2 U$3.3
N$80: IC2.7 R21.1 R23.2
N$81: IC2.6 R22.1 R23.1
N$82: C9.2 R19.1 R20.2 U$3.5
N$83: R22.2 RS485.1
N$84: R21.2 RS485.3
N$86: SJ2.2 U4.7
N$87: IC1.109
N$88: L4.P$2 U$7.3
N$91: B6.2 C28.2 C29.1 R26.1 R27.1 U1.1 U1.7
N$93: B5.2 C27.2 U2.1 U2.4
N$113: R35.2 X2.4
PLL_CLK0: IC1.22 U1.10
PLL_CLK1: IC1.23 U1.9
PLL_CLK2: IC1.24 U1.6
RESET: IC1.28 R17.2
RGB_B: IC1.7 RN1.8
RGB_G: IC1.11 RN1.6
RGB_R: IC1.10 RN1.7
RS485_DIR: IC1.33 IC2.2 IC2.3 R24.2
RS485_RX: IC1.31 IC2.1 R25.2
RS485_TX: IC1.32 IC2.4
SO: R37.1 U4.2
SW_0: IC1.61 RN3.5
SW_1: IC1.60 RN3.6
SW_2: IC1.59 RN3.7
SW_3: IC1.58 RN3.8
SWS_0: IC1.55 RN7.5
SWS_1: IC1.54 RN7.6
SWS_2: IC1.53 RN7.7
SWS_3: IC1.52 RN7.8
TCK: IC1.16 R1.2
TDI: IC1.15 R3.2
TDO: IC1.20 R12.2
TMS: IC1.18 R4.2
USB_D+: D3.3 IC1.86
USB_D-: D3.4 IC1.85
USB_ID: IC1.87 R6.2 R35.1
VCCA: B3.2 C58.1 C59.1 IC1.3 IC1.35 IC1.75 IC1.94 IC1.97 IC1.107
VCCD: B4.2 C61.1 C64.1 IC1.1 IC1.37 IC1.73
VCCINT: B2.2 C44.1 C45.1 C46.1 C47.1 IC1.5 IC1.29 IC1.34 IC1.38 IC1.45 IC1.70 IC1.78 IC1.84 IC1.102 IC1.116 IC1.124 IC1.138
VCCIO: B1.2 C32.1 C34.1 C35.1 C36.1 C37.1 C38.1 C39.1 C40.1 IC1.17 IC1.26 IC1.40 IC1.47 IC1.56 IC1.62 IC1.81 IC1.93 IC1.117 IC1.122 IC1.130 IC1.139 R33.1 R34.1 R36.2
VIN: C12.1 C13.1 D1.K D2.5 JP1.2 Q3.3 X1.1